# Altium PCB VGA Breakout.PcbDoc
Units mil, origin at the board's own origin, x right, y up, seen from the top; angles counter-clockwise.
Board outline 660 x 1230 mil, 2 copper layers (Top Layer, Bottom Layer), stack 61.756 mil thick; 2 components, 9 nets, 26 pads, 0 vias.
Unrouted connection lines stored in the file: 7.
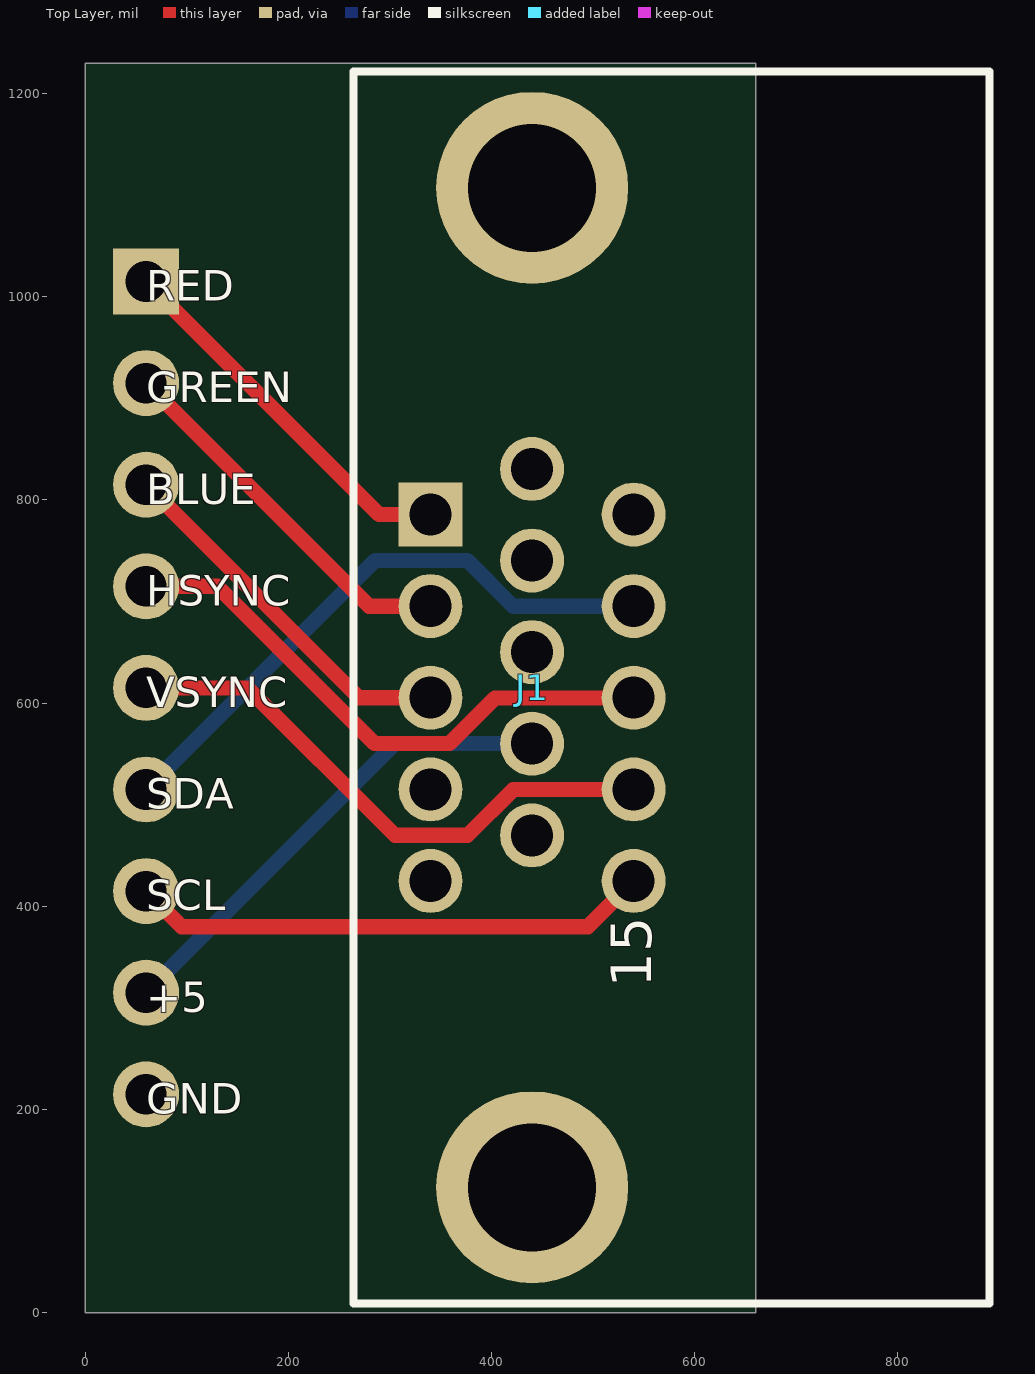
[diagram p0: Top Layer view]
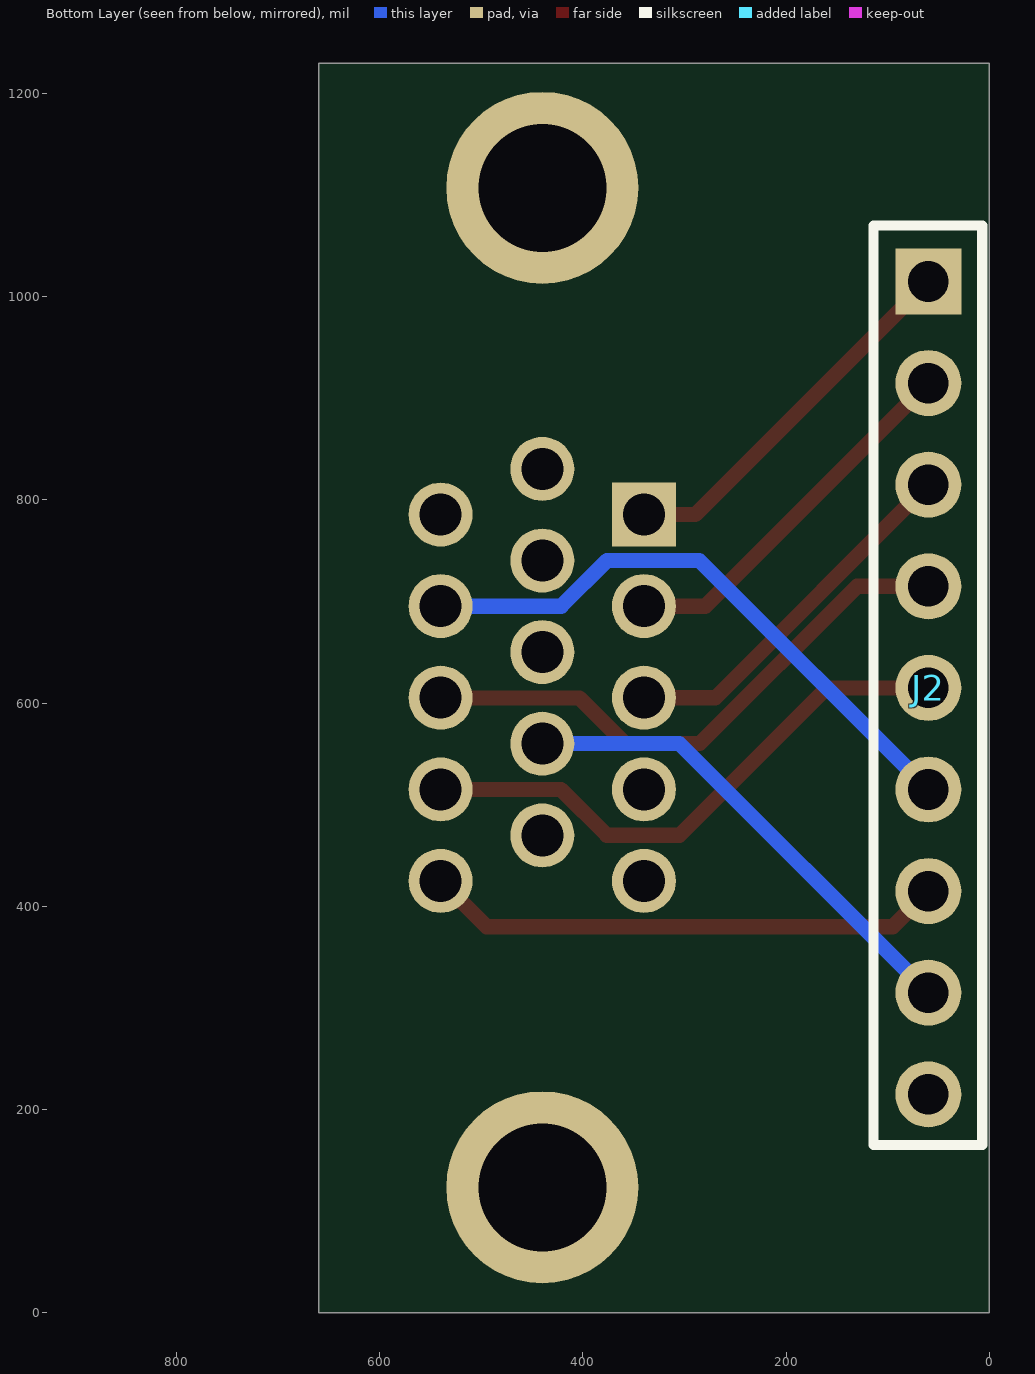
[diagram p1: Bottom Layer view, seen from below]

## Layer stack, top to bottom
Top Solder: solder mask 1, PSR-4000BN, Dk 4.5
Top Layer: signal copper 1.378
Dielectric 1: core 59, Kingboard KB6167F, Dk 4.5
Bottom Layer: signal copper 1.378
Bottom Solder: solder mask 1, PSR-4000BN, Dk 4.5

## Board outline
0,1230 0,0 660,0 660,1230

## Design rules (kind name [scope] priority, off if disabled: settings)
BoardOutlineClearance IgnoreCompOutline [OnSilkscreen AND (NOT IsText) AND InAnyComponent] p1: gap=0 ignorepadtopadclearanceinfootprint=FALSE
BoardOutlineClearance [All] p2: gap=15 ignorepadtopadclearanceinfootprint=FALSE
Clearance [All] p1: gap=6 ignorepadtopadclearanceinfootprint=FALSE except(0: Arc-Hole Track-Hole SMDPad-Hole THPad-Hole Via-Hole Fill-Hole Poly-Hole Region-Hole Text-Hole)
ComponentClearance [All] p1: gap=1 collisioncheckmode=3 verticalgap=1 showdistances=FALSE
DiffPairsRouting [All] p1: maxlimit=393.7 minlimit=6 mostfreqgap=8 toplayer_minwidth=6 toplayer_maxwidth=15 toplayer_prefwidth=8 bottomlayer_minwidth=6 bottomlayer_maxwidth=15 bottomlayer_prefwidth=8 maxuncoupledlength=500
HoleSize [All] p1: absolutevalues=TRUE maxlimit=265 minlimit=13 maxpercent=80.000 minpercent=20.000
HoleToHoleClearance [All] p1: gap=10 allowstackedmicrovias=FALSE
MinimumAnnularRing [All] p1: minimumring=7
MinimumSolderMaskSliver [All] p1: minsoldermaskwidth=0
PlaneClearance [All] p1: clearance=10
PlaneConnect [All] p1: planeconnectstyle=Direct reliefexpansion=16 reliefentries=4 reliefconductorwidth=6 reliefairgap=6
PolygonConnect [All] p1: thpad.connectstyle=Relief thpad.reliefconductorwidth=8 thpad.reliefentries=4 thpad.polygonreliefangle="90 Angle" thpad.airgapwidth=6 smdpad.connectstyle=Relief smdpad.reliefconductorwidth=8 smdpad.reliefentries=4 smdpad.polygonreliefangle="90 Angle" smdpad.airgapwidth=6 via.connectstyle=Direct via.reliefconductorwidth=8 via.reliefentries=4 via.polygonreliefangle="90 Angle" via.airgapwidth=6
RoutingCorners [All] p1: cornerstyle=45-Degree minsetback=49.21 maxsetback=49.21
RoutingVias [All] p1: holewidth=15 width=30 viastyle="Through Hole" minholewidth=13 minwidth=27 maxholewidth=100 maxwidth=114
SilkToSilkClearance [All] p1: silktosilkclearance=0
SilkToSolderMaskClearance [IsPad] p1: minsilkscreentomaskgap=6 clearancetoexposedcopper=TRUE
SolderMaskExpansion [All] p1: expansion=2.95 istentingtop=FALSE
Width [All] p1: maxlimit=400 minlimit=6 preferedwidth=8
20 further rules are at their usual default settings.

## Components (designator, comment, footprint, x,y, rotation, side; value= is the part's Value field where it differs from the comment)
J1 "DSUB HD DB15 HD14 FEMALE" 618015330923 577.01,615.31 r90 top
J2 "9 contacts Male header" PH1-09-UA 60,615 r270 bottom

## Footprints (in the part's own frame and the unit in brackets; to place one, negate y for a bottom-side part, rotate by r counter-clockwise, add the part's x,y. Pads: shape width x height; smd on the part's side, far side on the other; paste and mask are expansions set on the pad)
618015330923 [mm] "15 pins, right angled"
  rect 1.6x1.6 hole 1.05: 1(4.326,6.02)
  round 1.6 hole 1.05: 2(2.036,6.02) 3(-0.254,6.02) 4(-2.544,6.02) 5(-4.834,6.02) 6(5.466,3.48) 7(3.176,3.48) 8(0.886,3.48) 9(-1.404,3.48) 10(-3.694,3.48) 11(4.326,0.94) 12(2.036,0.94) 13(-0.254,0.94) 14(-2.544,0.94) 15(-4.834,0.94)
  round 4.8 hole 3.2: M1(-12.495,3.48) M2(12.495,3.48)
  silkscreen extent -15.4,-7.95 15.4,7.95, body extent -15.4,-13.95 15.4,7.95, height 12.55
PH1-09-UA [mil]
  rect 65x65 hole 40: 1(-400,0)
  round 65 hole 40: 2(-300,0) 3(-200,0) 4(-100,0) 5(0,0) 6(100,0) 7(200,0) 8(300,0) 9(400,0)
  silkscreen extent -455,-54 450,53, body extent -450,-49 450,49, height 335

## Part data
J1: library part 618015330923, "15 Position D-Sub, High Density Receptacle, Female Sockets Connector", Current Rating=3A, Manufacturer="Würth Elektronik", ComponentLink1Description="Manufacturer Website", ComponentLink1URL=#https://www.we-online.com/web/en/wuerth_elektronik/start.php#, ComponentLink2Description="Component Datasheet", ComponentLink2URL=#https://katalog.we-online.de/em/datasheet/618015330923.pdf#, Contact Finish=Gold, Description in Visual="Con D-Sub TH F HD15 Hor F-Jack", Gender=Female, Jackscrew="Mating Side, Female Screwlock (4-40)", Manufacturer P/N=618015330923, Mount="Through Hole, Right Angle", Number of Contacts=15HD, Orientation=Horizontal, P/N=618015330923, PCB Package=618015330923, Shell Finish="Steel, Nickel Plated", Shell Size="(DE, E) High Density", Type=WR-DSUB
J2: library part PH1-09-UA, "Connector Male Header 1X9 vertical 9contacts 0.100in pitch Gold", Manufacturer="Adam Tech", PCB Package="THT 9", ComponentLink1Description="Manufacturer Website", ComponentLink1URL=http://www.adam-tech.com/, ComponentLink2Description="Component Datasheet", ComponentLink2URL=http://www.adam-tech.com/downloader.php?p=PH1-XX-UA.pdf, Contact Finish=Gold, Description in Visual="Con Hdr Male 9contacts vertical 9x1", Gender=Male, Manufacturer P/N=PH1-09-UA, Number of Contacts=9, Number of Rows=1, Orientation=vertical, P/N=PH1-09-UA, Pitch=0.100in

## Nets (pads, with @x,y where several pads share a name; then routed paths per layer and width w, separated by ;. In a path a pad name is that pad's centre, name@x,y a point inside that pad or via, vN(x,y) a via of type N, cw(c..) or ccw(c..) an arc to the next point about the centre after c; other vN are vias at no path point)
+5: J1.9 J2.8 | length 481.6
  Bottom Layer w15: J2.8 305.15,560.15 439.89,560.15 J1.9
BLUE: J1.3 J2.3 | length 366.9
  Top Layer w15: J2.3 269.68,605.31 J1.3
GND: J1.5 J1.6 J1.7 J1.8 J1.10 J1.M1 J1.M2 J2.9
GREEN: J1.2 J2.2 | length 370.9
  Top Layer w15: J2.2 279.53,695.47 J1.2
HSYNC: J1.13 J2.4 | length 562.7
  Top Layer w15: J2.4 130.3,715 284.98,560.32 358.64,560.32 403.35,605.04 539.72,605.04 J1.13
RED: J1.1 J2.1 | length 375
  Top Layer w15: J2.1 289.37,785.63 J1.1
SCL: J1.15 J2.7 | length 513.1
  Top Layer w15: J2.7 95,380 495,380 J1.15
SDA: J1.12 J2.6 | length 592.1
  Bottom Layer w15: J2.6 285.47,740.47 376.25,740.47 421.36,695.36 539.89,695.36 J1.12
VSYNC: J1.14 J2.5 | length 558.8
  Top Layer w15: J2.5 160,615 305,470 376.48,470 421.53,515.04 539.89,515.04 J1.14
pads on no net: J1.4 J1.11

## Polygon pours and split planes (outlines as drawn)
GND on Bottom Layer "botg" (solid, remove dead copper, pour order 0): 0,1230 0,0 660,0 660,1230

## Silkscreen, mask and mechanical layers (free items; w line width, h text height)
Top Overlay:
  text "RED" at 60,996 h30
  text "GREEN" at 60,896 h30
  text "BLUE" at 60,796 h30
  text "HSYNC" at 60,696 h30
  text "VSYNC" at 60,596 h30
  text "SDA" at 60,496 h30
  text "SCL" at 60,396 h30
  text "+5" at 60,296 h30
  text "GND" at 60,196 h30
Board Outline:
  the board outline again, w10

## Text inside footprints (layer, text, board x,y; h text height)
J1: Top Overlay "15" at 557.32,320.04 h40 r90; Designer Notes "PCB Edge" at 971.5,481.46 h40 r90